# EAGLE board SEALD KRSBI 2K20 (EAGLE 9.6.2), part 1 of 2
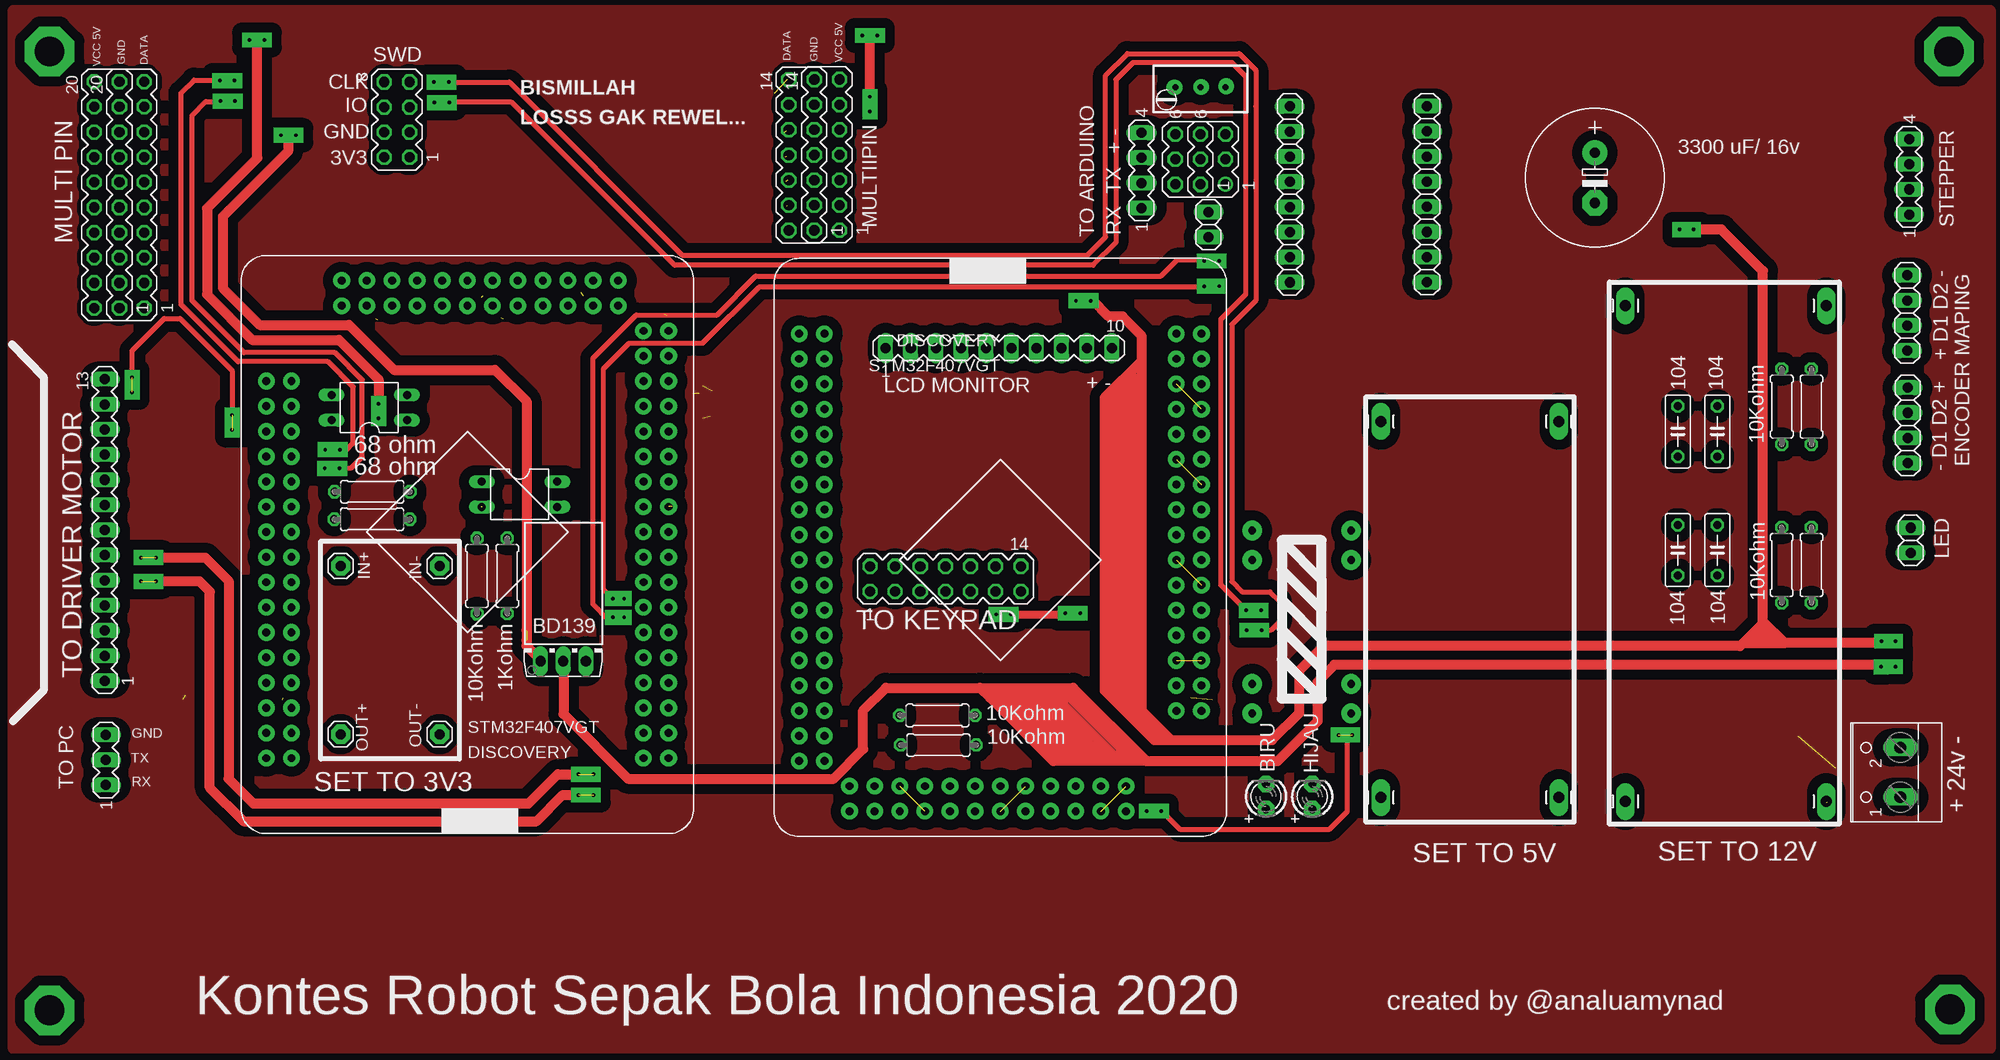
[diagram p0: board, top side]
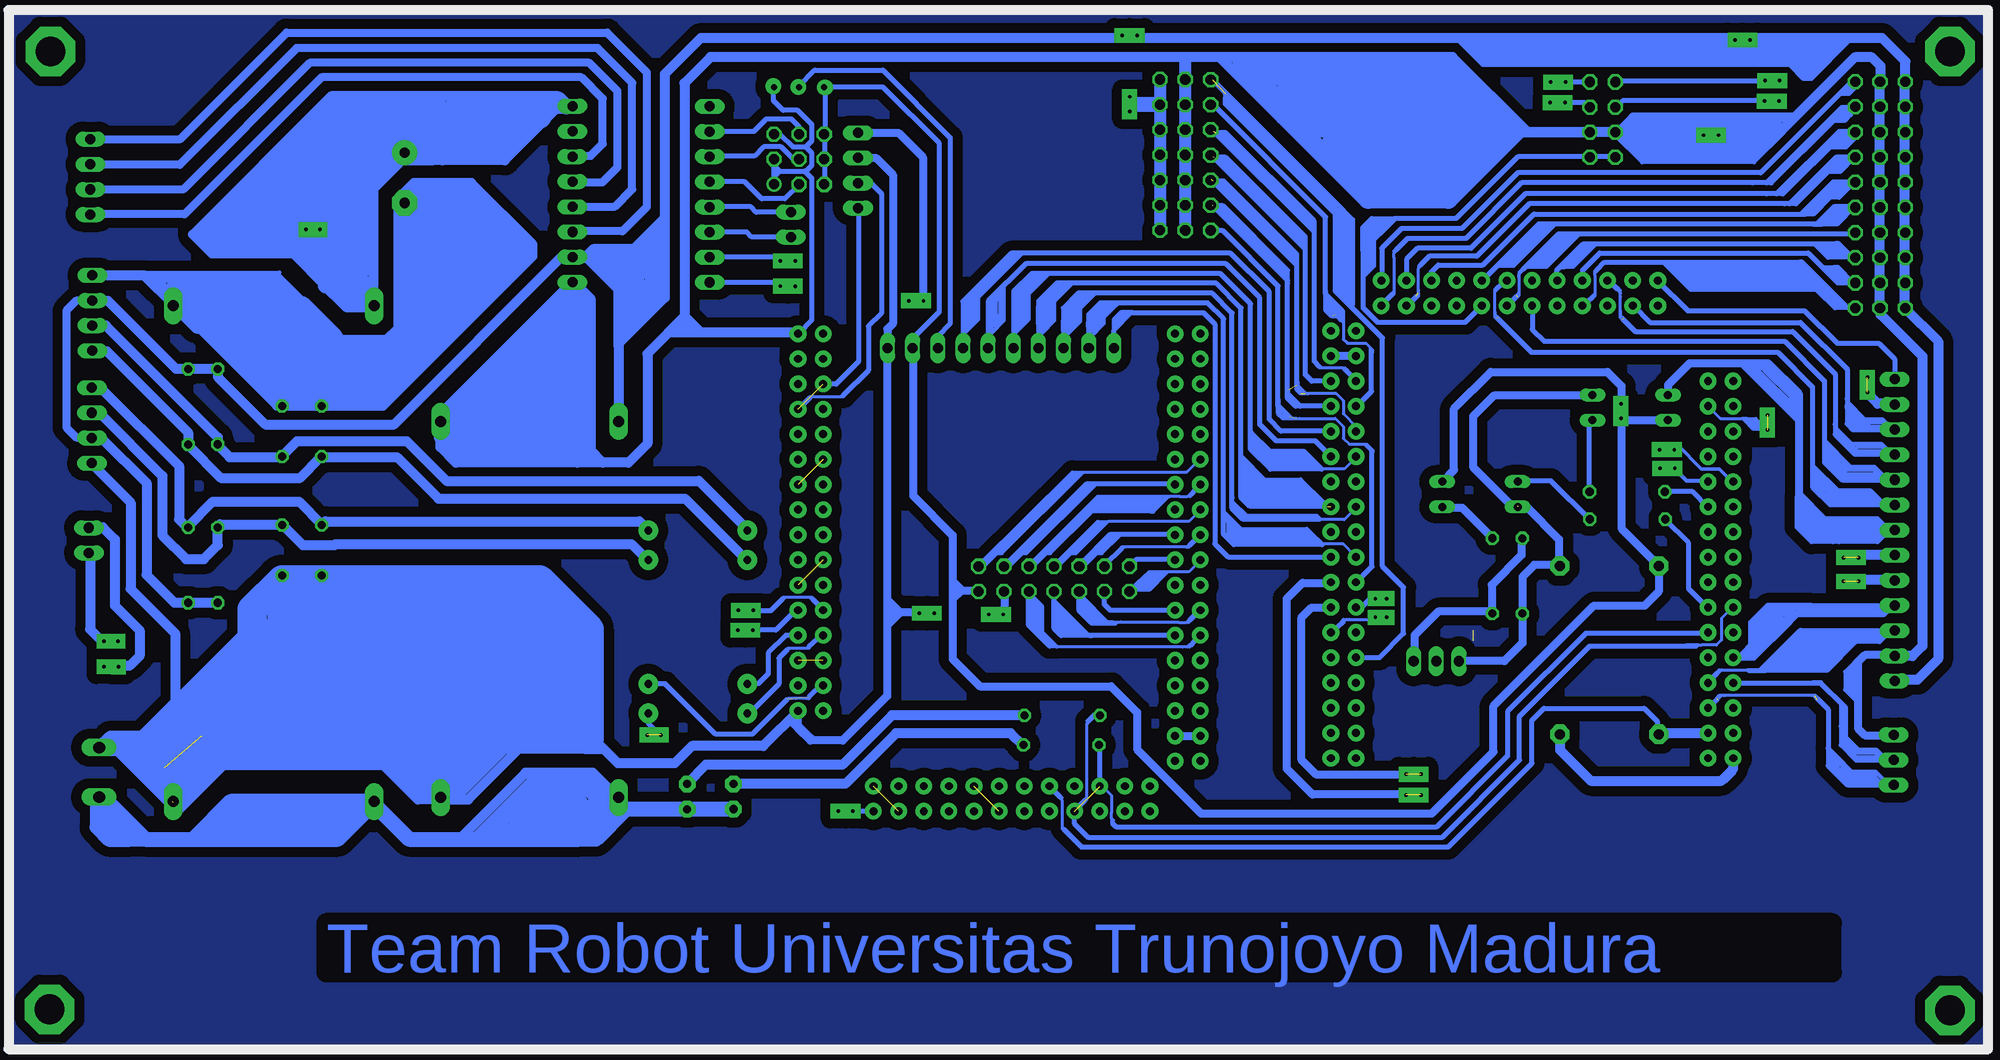
[diagram p1: board, bottom side, seen from below]

No outline drawn. Coordinates in mm, seen from the top.
Copper layers (1*16): Top 0.035mm / dielectric 1.5mm / Bottom 0.035mm
Design rules "default *": minimum track width 6mil, minimum drill 0.35mm, track to track 40mil, track to pad 40mil, pad to pad 40mil, via to via 40mil, smd to smd 30mil, copper to edge 0mil, drill to drill 0mil, minimum pad ring 10mil, minimum via ring 8mil, stop-mask expansion 0mil, vias tented up to drill 0mil, thermal gap 0mil

## Footprints (pad centres in the part's own frame; a part is rotated, then mirrored left to right if it is on the bottom)
DIL04 = drill 0.813 long: 1 -1.27,-3.81; 2 1.27,-3.81; 3 1.27,3.81; 4 -1.27,3.81
0207/7 = drill 0.813 octagon: 1 -3.81,0; 2 3.81,0
MA03-1 = drill 1.016 long: 1 -2.54,0; 2 0,0; 3 2.54,0
C050-025X075 = drill 0.813 octagon: 1 -2.54,0; 2 2.54,0
MA04-2 = drill 1.016 octagon: 1 -3.81,-1.27; 2 -3.81,1.27; 3 -1.27,-1.27; 4 -1.27,1.27; 5 1.27,-1.27; 6 1.27,1.27; 7 3.81,-1.27; 8 3.81,1.27
MA10-1 = drill 1.016 long: 1 -11.43,0; 2 -8.89,0; 3 -6.35,0; 4 -3.81,0; 5 -1.27,0; 6 1.27,0; 7 3.81,0; 8 6.35,0; 9 8.89,0; 10 11.43,0
RTRIMT93YA = drill 0.61: 1 0,-2.54; 2 0,0; 3 0,2.54
MA10-2 = drill 1.016 octagon: 1 -11.43,-1.27; 2 -11.43,1.27; 3 -8.89,-1.27; 4 -8.89,1.27; 5 -6.35,-1.27; 6 -6.35,1.27; 7 -3.81,-1.27; 8 -3.81,1.27; 9 -1.27,-1.27; 10 -1.27,1.27; 11 1.27,-1.27; 12 1.27,1.27; 13 3.81,-1.27; 14 3.81,1.27; 15 6.35,-1.27; 16 6.35,1.27; 17 8.89,-1.27; 18 8.89,1.27; 19 11.43,-1.27; 20 11.43,1.27
1X01_LONGPAD = drill 1.118 pad 1.88 long: 1 0,0
TO126AV = drill 1.016 long: B 2.286,-1.27; C 0,-1.27; E -2.286,-1.27
1X04 = drill 1.016 long: 1 -3.81,0; 2 -1.27,0; 3 1.27,0; 4 3.81,0
MA13-1 = drill 1.016 long: 1 -15.24,0; 2 -12.7,0; 3 -10.16,0; 4 -7.62,0; 5 -5.08,0; 6 -2.54,0; 7 0,0; 8 2.54,0; 9 5.08,0; 10 7.62,0; 11 10.16,0; 12 12.7,0; 13 15.24,0
E5-13 = drill 1.016 pad 2.54: + -2.54,0 | drill 1.016 pad 2.54 octagon: - 2.54,0
LED3MM = drill 0.813 pad 1.676 octagon: A -1.27,0; K 1.27,0
W237-102 = drill 1.194 long: 1 -2.5,-1.27; 2 2.5,-1.27
1X08 = drill 1.016 long: 1 -8.89,0; 2 -6.35,0; 3 -3.81,0; 4 -1.27,0; 5 1.27,0; 6 3.81,0; 7 6.35,0; 8 8.89,0
MA03-2 = drill 1.016: 1 -2.54,-1.27 | drill 1.016 octagon: 2 -2.54,1.27; 3 0,-1.27; 4 0,1.27; 5 2.54,-1.27; 6 2.54,1.27
1X02 = drill 1.016 long: 1 -1.27,0; 2 1.27,0
MA04-1 = drill 1.016 long: 1 -3.81,0; 2 -1.27,0; 3 1.27,0; 4 3.81,0
MA07-2 = drill 1.016 octagon: 1 -7.62,-1.27; 2 -7.62,1.27; 3 -5.08,-1.27; 4 -5.08,1.27; 5 -2.54,-1.27; 6 -2.54,1.27; 7 0,-1.27; 8 0,1.27; 9 2.54,-1.27; 10 2.54,1.27; 11 5.08,-1.27; 12 5.08,1.27; 13 7.62,-1.27; 14 7.62,1.27
1X01 = drill 1.016 pad 1.93 octagon: 1 0,0
STM32F407VGT = drill 0.8 pad 1.676: 1 22.86,12.7; 2 25.4,12.7; 3 22.86,15.24; 3.3V(0) -12.7,-25.4; 3.3V(1) 22.86,-20.32; 3.3V(3) 10.16,17.78; 4 25.4,15.24; GND -15.24,-27.94; GND(0) -15.24,-25.4; GND(1) 25.4,-20.32; GND(2) -15.24,10.16; GND(3) 12.7,17.78; PA0 25.4,-15.24; PA1 22.86,-12.7; PA2 25.4,-12.7; PA3 25.4,-10.16; PA4 22.86,-7.62; PA5 25.4,-7.62; PA6 22.86,-5.08; PA7 25.4,-5.08; PA8 -15.24,7.62; PA9 -12.7,5.08; PA10 -15.24,5.08; PA11 -12.7,2.54; PA12 -15.24,2.54; PA13 -12.7,0; PA14 -15.24,0; PA15 -12.7,-2.54; PB0 22.86,0; PB1 25.4,0; PB2 25.4,10.16; PB3 -12.7,-17.78; PB4 -15.24,-17.78; PB5 -12.7,-20.32; PB6 -15.24,-20.32; PB7 -12.7,-22.86; PB8 22.86,2.54; PB9 25.4,2.54; PB10 15.24,17.78; PB11 12.7,20.32; PB12 10.16,20.32; PB13 7.62,17.78; PB14 7.62,20.32; PB15 5.08,17.78; PC0 22.86,-17.78; PC1 25.4,-17.78; PC2 22.86,-15.24; PC3 22.86,-10.16; PC4 22.86,-2.54; PC5 25.4,-2.54; PC6 -5.08,20.32; PC7 -7.62,17.78; PC8 -7.62,20.32; PC9 -12.7,7.62; PC10 -15.24,-2.54; PC11 -12.7,-5.08; PC12 -15.24,-5.08; PC13 25.4,-22.86; PD0 -12.7,-7.62; PD1 -15.24,-7.62; PD2 -12.7,-10.16; PD3 -15.24,-10.16; PD4 -12.7,-12.7; PD5 -15.24,-12.7; PD6 -12.7,-15.24; PD7 -15.24,-15.24; PD8 5.08,20.32; PD9 2.54,17.78; PD10 2.54,20.32; PD11 0,17.78; PD12 0,20.32; PD13 -2.54,17.78; PD14 -2.54,20.32; PD15 -5.08,17.78; PE0 -15.24,-22.86; PE1 22.86,5.08; PE2 22.86,-27.94; PE3 25.4,-27.94; PE4 22.86,-25.4; PE5 25.4,-25.4; PE6 22.86,-22.86; PE7 25.4,5.08; PE8 22.86,7.62; PE9 25.4,7.62; PE10 22.86,10.16; PE11 20.32,20.32; PE12 20.32,17.78; PE13 17.78,20.32; PE14 17.78,17.78; PE15 15.24,20.32; VCC -12.7,-27.94; VCC(2) -12.7,10.16

## Placement (x,y rotation side)
E$1  [DIL04]  130.8,-15.6 90 top
E$2  [0207/7]  131.1,-24.1 0 top
E$3  [MA03-1]  104.2,-51.2 90 top
E$5  [C050-025X075]  263,-18 90 top
E$6  [C050-025X075]  267,-30 90 top
E$7  [MA04-2]  133.6,13.5 90 top
E$8  [MA10-1]  194.4,-9.58 0 top
E$9  [RTRIMT93YA]  214.78,16.8 90 top
E$10  [MA10-2]  106.8,5.9 90 top
E$11  [MA10-2]  104.3,5.9 90 top
E$12  [1X01_LONGPAD]  251,-17 180 top
E$13  [1X01_LONGPAD]  233,-17 180 top
E$14  [TO126AV]  150.4,-39.95 0 top
E$15  [1X04]  286.22,-17.39 90 top
E$16  [MA13-1]  104.09,-27.97 90 top
E$17  [E5-13]  254.63,7.63 270 top
E$18  [LED3MM]  221.4,-54.9 90 top
E$19  [LED3MM]  226.07,-54.91 90 top
E$20  [0207/7]  188.2,-46.7 0 top
E$21  [0207/7]  188.3,-49.7 0 top
E$22  [1X04]  286.17,-6.04 90 top
E$23  [1X01_LONGPAD]  257.7,-5.3 0 top
E$24  [1X01_LONGPAD]  278,-5.3 0 top
E$25  [1X01_LONGPAD]  278,-55.4 0 top
E$26  [1X01_LONGPAD]  257.7,-55.4 0 top
E$27  [1X01_LONGPAD]  251,-55 180 top
E$28  [1X01_LONGPAD]  233,-55 180 top
E$29  [W237-102]  284.22,-52.45 90 top
E$30  [1X08]  223.81,5.95 90 top
E$31  [1X08]  237.67,5.97 90 top
E$32  [MA03-2]  216.05,9.5 90 top
E$33  [MA03-2]  213.5,9.5 90 top
E$34  [1X02]  215.6,2.9 90 top
E$35  [MA04-1]  208.82,8.37 90 top
E$36  [MA04-1]  286.38,7.72 90 top
E$37  [1X02]  286.53,-29.01 90 top
E$38  [C050-025X075]  263,-30 90 top
E$40  [C050-025X075]  267,-18 90 top
E$42  [DIL04]  145.98,-24.35 270 top
E$43  [0207/7]  131.08,-26.88 0 top
E$44  [0207/7]  144.74,-32.61 90 top
E$45  [0207/7]  141.69,-32.61 90 top
E$46  [MA07-2]  189.01,-32.9 0 top
E$47  [MA07-2]  174.46,9.93 90 top
E$48  [MA07-2]  177.04,9.94 90 top
E$49  [0207/7]  276.5,-15.5 270 top
E$50  [0207/7]  273.5,-31.5 270 top
E$51  [0207/7]  273.5,-15.49 270 top
E$52  [0207/7]  276.5,-31.5 270 top
IN+  [1X01]  127.9,-31.6 90 top
IN-  [1X01]  137.9,-31.6 90 top
OUT+  [1X01]  127.9,-48.6 90 top
OUT-  [1X01]  137.9,-48.6 90 top
U$1  STM32F407(BOARD)  [STM32F407VGT]  199.64,-36.07 180 top
U$2  STM32F407(BOARD)  [STM32F407VGT]  135.64,-23.08 0 top

## Library data of the parts
E$1 E$42 = ic-package
E$2 E$43-E$45 = resistor
E$3 E$7 E$8 E$10 E$11 E$16 E$32 E$33 E$35 E$36 E$46-E$48 = con-lstb
E$5 E$6 E$9 E$17 E$20 E$21 E$38 E$40 E$49-E$52 = rcl
E$12 E$13 E$23-E$28 = SparkFun-Connectors
E$14 = transistor-power
E$15 E$22 E$30 E$31 E$34 E$37 = pinhead
E$18 E$19 IN+ IN- OUT+ OUT- = adafruit
E$29 = con-wago-500
U$1 U$2 = KRI COMPONENT

## Nets
N$6: U$1.PB10 U$1.PB11
N$7: U$1.PD8 U$1.PD9
N$8: U$1.PC6 U$1.PC7
N$9: U$1.PA9 U$1.PA10
N$10: U$1.PC10 U$1.PC11
N$11: U$1.PD5 U$1.PD6
N$12: U$1.PB6 U$1.PB7
S$4: U$2.PD13
S$15: E$3.2
S$18: IN-.1
S$43: OUT+.1
S$44: OUT-.1
S$69: U$2.3.3V(3)
S$78: E$13.1
S$97: E$35.3
S$145: E$30.7
S$156: E$12.1
S$214: E$26.1
S$306: IN+.1

## Tracks (layer width: path | path; a pad name or v marks a point on that pad's centre or on a via)
DD
  pour Top: 94.9,24.6 294.6,24.6 294.6,-80 294.6,-80.4 292.4,-80.4 94.8,-80.4 94.8,-69.7 94.8,24.6
N$6  (1 unrouted)
N$7  (1 unrouted)
N$8  (1 unrouted)
N$9  (1 unrouted)
N$10  (1 unrouted)
N$11  (1 unrouted)
N$12  (1 unrouted)
PG
  pour Bottom: 94.8,24.4 294.5,24.39 294.5,-80.2 94.8,-80.2
S$1  (via drill 0.35 pad 1.5)  (2 unrouted)
  Top 1: v109.25,-30.75 114.25,-30.75 116.6,-33.1 116.6,-53.1 119.1,-55.6 146.9,-55.6 149.85,-52.65 v151.95,-52.65
  other vias: 107.75,-30.75 153.45,-52.65
S$2
  Bottom 1: 146.2,12.8 146.2,11.5 | 146.2,11.5 147.8,11.5 | 146.2,11.5 144.6,11.5 144.6,11.8
S$3  (via drill 0.35 pad 1.5)  (2 unrouted)
  Top 1: v151.95,-54.75 150.35,-54.75 147.7,-57.4 118.1,-57.4 114.7,-54 114.7,-34.2 113.65,-33.15 v109.25,-33.15
  other vias: 107.75,-33.15 153.45,-54.75
S$5
  Bottom 0.4: 108.4,-21.7 111.2,-18.9 | 111.2,-18.9 111.2,-18.6 | 111.2,-18.9 111.2,-20.5 110.3,-21.4 110.2,-21.3 109,-21.3 | 109,-21.3 108.9,-21.4 | 109,-21.3 110.7,-19.6 110.9,-19.6 110.9,-20.4 110.3,-21 109.7,-21 110.6,-20.1 110.7,-20.1 110.7,-20.2 110.2,-20.7
  Bottom 0.5: 140.7,-5.3 140.7,-7.7 139.5,-8.9 115.2,-8.9 111.2,-12.9 111.2,-18.6 111.2,-21.1 109.4,-22.9 104.1,-22.9
S$6
  Bottom 1: 152.9,17.9 164.8,17.9 164.8,15.9 147.8,15.9 147.8,13.7 | 147.8,13.7 161.2,13.7 | 147.8,13.7 145,13.7 145,9.8 155.1,9.8 155.1,15.5 | 155.1,15.6 155.1,15.5 | 155.1,15.5 148.6,15.5 | 155.1,15.5 160.2,15.5 160.2,15.4
S$7
  Bottom 0.4: 113.9,-17.9 113.9,-17 119.3,-11.6 | 119.8,-11.1 119.3,-11.6 | 119.3,-11.6 117.1,-11.6
  Bottom 0.8: 104.1,-28 110.9,-28 113.8,-25.1 113.8,-14.2 116.9,-11.1 119.8,-11.1 124.8,-11.1 127,-13.3 127,-14.3
  Bottom 1: 117.1,-11.6 114.3,-14.4 114.3,-15.7 114,-16 114,-16.1 118.2,-11.9 118.4,-11.9
S$8
  Bottom 0.5: 134.6,-17.1 135,-17.5 135,-24.1
S$9  (2 unrouted)
  Bottom 0.3: 112.33,-44.7 112.06,-44.7 111.75,-45 | 112.33,-44.7 121.2,-44.7 121.84,-44.7 122.08,-44.94 | 112.2,-44.7 112.5,-44.7 | 112.33,-44.7 111.96,-45.08 | 121.4,-44.7 121.56,-44.7 121.98,-45.12
S$10
  Bottom 0.8: 230,-16.88 230,-17.12
S$11
  Bottom 0.4: 104.3,-17.8 105.3,-16.8 107.4,-16.8 106.7,-17.5 104.9,-17.5 | 104.9,-17.5 104.8,-17.6 | 104.9,-17.5 105.3,-17.1 106.8,-17.1 | 107,-16.9 108.9,-15 108.9,-14.7 | 108.9,-15.4 108.94,-15.44 108.94,-17.26 108.35,-17.85 106.27,-17.85 106.62,-17.5 108.2,-17.5 108.7,-17 108.7,-16.3 | 108.7,-16.2 108.7,-16.3 | 108.7,-16.3 108.1,-16.9 | 107.7,-17.3 108.1,-16.9 | 108.1,-16.9 108.4,-16.9 108.4,-17 108.1,-17.3
  Bottom 0.5: 130.5,-5.3 128.8,-7 113.6,-7 108.9,-11.7 108.9,-14.7 108.9,-15.4 108.9,-15.6 106.7,-17.8 104.3,-17.8 104.2,-17.8
S$12
  Bottom 0.4: 108.3,-19.4 110.1,-17.6 | 110.1,-17.6 110.1,-17.3 | 110.1,-17.6 110.1,-17.9 108.8,-19.2
  Bottom 0.5: 131.6,-6.6 130.3,-7.9 114.4,-7.9 110.1,-12.2 110.1,-17.3 110.1,-18.3 108.1,-20.3 104.1,-20.3
S$13
  Bottom 0.5: 108.42,14.71 109.41,14.71 117.01,7.11 141.79,7.11 147.4,1.5 153.3,1.5 154.5,0.3
S$14
  Bottom 0.4: 123.1,-23 125.1,-23 126.4,-21.7
S$15
  Bottom 0.4: 104.9,-51.2 105.9,-50.2 108.7,-50.2 108,-50.9 105.6,-50.9 | 105.5,-50.9 105.6,-50.9 | 105.6,-50.9 106,-50.5 108.1,-50.5 | 107.6,-50.3 109.5,-48.4 | 109.5,-48.4 109.5,-47.8 | 109.5,-48.4 109.5,-49.2 108.7,-50 108.3,-50 109.2,-49.1
  Bottom 0.5: 120.3,-43.4 111.6,-43.4 109.5,-45.5 109.5,-47.8 109.5,-49.7 108,-51.2 104.9,-51.2 E$3.2
S$16
  Bottom 0.5: 185.9,-55.3 187,-56.4 187,-57.6 185.6,-59 149.8,-59 142,-51.2 142,-46.8 134.9,-39.7 124.8,-39.7
S$17
  Bottom 0.8: 104.1,-40.6 107.1,-40.6 107.8,-41.3 107.8,-48 107.1,-48.7 104.2,-48.7
S$18
  Bottom 1: 138,-31.5 IN-.1
S$19
  Bottom 0.4: 108.1,9.7 109.6,8.2 110.8,8.2 114.04,4.96 115.2,4.96 115.16,5 114.2,5 110.9,8.3 110.9,8.4 109.9,9.4 109.3,9.4 | 109.3,9.4 108.8,9.4 109.7,8.5 109.9,8.5 | 109.9,8.5 110.3,8.5 | 110.3,8.5 110.4,8.4 | 110.3,8.5 109.7,9.1 109.7,9.2 | 109.3,9.4 109.9,8.8 109.9,8.5
  Bottom 0.5: 108.1,9.7 110,9.7 114.7,5 141,5 146.3,-0.3 151.1,-0.3 151.95,-1.15
S$20
  Bottom 0.4: 108.2,-3 109.8,-1.4 110.2,-1.4 | 111.3,-1.4 110.2,-1.4 | 110.2,-1.4 109,-2.6 | 108.9,-2.7 109,-2.6 | 109,-2.6 109.8,-2.6 110.7,-1.7 | 110.7,-1.7 110.8,-1.7 | 110.7,-1.7 110.2,-1.7 109.6,-2.3
  Bottom 0.5: 135.6,-2.8 135.6,-1.7 133.88,0.02 112.82,0.02 109.8,-3 108.2,-3 108.1,-3
S$21
  Bottom 0.4: 108.2,12.3 108.6,11.9 109.5,11.9 115.45,5.95 | 115.45,5.95 117.03,5.95 | 115.45,5.95 115.35,5.95 109.3,12
  Bottom 0.5: 108.1,12.3 108.2,12.3 109.7,12.3 116,6 141.4,6 146.9,0.5 152.3,0.5 153.4,-0.6 153.4,-2.8
S$22
  Bottom 0.5: 117.5,17.4 132.2,17.4
S$23
  Bottom 0.4: 109.6,-24.2 112.4,-21.4 | 112.4,-21.4 112.4,-20.9 | 112.4,-21.4 112.4,-23.1 111.7,-23.8 111.6,-23.7 110.5,-23.7 | 110.4,-23.7 110.5,-23.7 | 110.5,-23.7 112,-22.2 | 112.1,-22.1 112,-22.2 | 112,-22.2 112,-23 111.5,-23.5 111.2,-23.5 111.8,-22.9 111.8,-22.8
  Bottom 0.5: 144.33,-6.47 140.8,-10 115.9,-10 112.4,-13.5 112.4,-20.9 112.4,-23.6 110.6,-25.4 104.1,-25.4
S$24
  Top 0.5: 220.9,-36.16 219.45,-36.16 216.83,-33.54 216.83,-6.67 219.36,-4.14 219.36,17.85 217.94,19.27 207.96,19.27 206.23,17.54 206.23,1.07 203.94,-1.22 161.66,-1.22 145.2,15.24 138.89,15.24
S$25
  Bottom 1: 105.6,-5.6 105.6,17.4 105.5,17.5 105.5,18.9 106.4,19.8 108.13,19.8 115.69,12.24 134.9,12.24
S$26
  Top 0.5: 138.96,17.29 144.96,17.29 162.43,-0.18 203.38,-0.18 205.2,1.64 205.2,17.99 207.38,20.17 218.69,20.17 220.36,18.5 220.36,14.84 220.37,14.83 220.37,-4.77 217.95,-7.19 217.95,-33.18 218.98,-34.21 221.81,-34.21 222.73,-35.13 222.73,-37.25 221.88,-38.1 221.03,-38.1
S$27  (1 unrouted)
  Bottom 0.8: 134.6,-14.4 144.6,-14.4 146.7,-16.5 146.7,-21.6 142.7,-25.6 142.2,-25.6 | 138,-31.3 138,-28.9 141.3,-25.6 142.1,-25.6
S$28
  Bottom 0.3: 120.5,-35.8 121.6,-36.9 121.6,-39.1 122.1,-39.6 123.6,-39.6 123.9,-39.6 | 123.9,-39.6 125.2,-39.6 125.2,-39.7 125.3,-39.8 124.1,-39.8 123.9,-39.6
S$29
  Bottom 0.4: 111.9,-3.7 124.7,-3.7 127.4,-1 115.1,-1 112.7,-3.4 112.5,-3.4 112.6,-3.3 124.6,-3.3 126.7,-1.2 115.2,-1.2 113.5,-2.9 | 113.4,-3 113.5,-2.9 | 113.5,-2.9 124.5,-2.9 126,-1.4 126.2,-1.4 126,-1.6 115.1,-1.6 114.2,-2.5 | 113.9,-2.8 114.2,-2.5 | 114.2,-2.5 124.6,-2.5 125.2,-1.9 125.3,-1.9 125.2,-2 115,-2 114.8,-2.2 124.4,-2.2 124.5,-2.3 | 108.3,-5.5 108.8,-5.5 113.43,-0.87 113.73,-0.87 | 115.35,-0.87 113.73,-0.87 | 113.73,-0.87 109.5,-5.1 110,-5.1 114,-1.1
  Bottom 0.5: 108.1,-5.5 108.3,-5.5 110.1,-5.5 111.9,-3.7 114.68,-0.92 133.41,-0.92 134.17,-1.68
S$30
  Bottom 0.5: 214.09,10.76 213.48,11.37 213.48,13 214.92,14.44 216.39,14.44 217.37,15.42 217.37,16.77
S$31
  Bottom 0.5: 212.25,16.84 212.15,16.74 212.15,11.97
S$32
  Bottom 0.5: 214.8,16.9 213.2,18.5 206.3,18.5 199.5,11.7 199.5,-7.1 200.8,-8.4 200.8,-9.6
S$33
  Bottom 0.8: 158.5,-10.4 161.1,-10.4
S$34
  Bottom 0.8: 174.2,-48.8 176.8,-48.8
S$35
  Bottom 1.5: 178.28,15.03 181.3,15.03 181.32,15.05
S$36
  Bottom 0.5: 216.57,-35.08 217.63,-36.14 219.27,-36.14
S$37  (via drill 0.35 pad 1.5)
  other vias: 219.41,-36.09
S$38  (via drill 0.35 pad 1.5)
  other vias: 220.91,-36.09
S$39
  Top 1: 181.42,15.03 181.42,21.51
S$40
  Bottom 0.5: 215.22,-36.18 217.12,-38.08 219.33,-38.08
S$41  (via drill 0.35 pad 1.5)
  other vias: 219.44,-38.09
S$42
  Bottom 0.5: 189.47,-39.7 191.59,-37.58 191.59,-34.5
S$43
  Bottom 1: 123,-48.5 127.8,-48.5 OUT+.1
S$44
  Bottom 0.8: 137.8,-50.3 134.9,-53.2 121.3,-53.2 120.4,-52.3 120.4,-51.2 120.4,-51.1
  Bottom 1: OUT-.1 137.9,-50.2 134.9,-53.2 134.8,-53.3 121.6,-53.3 120.4,-52.1 120.4,-51.2
S$45
  Top 1: 283.9,-41.6 228.3,-41.6 226.6,-43.3 226.6,-47.3 222.6,-51.3 209.3,-51.3 | 150.43,-41.24 150.43,-46.57 156.95,-53.09 177.71,-53.09 180.7,-50.1 180.7,-46.2 183,-43.9 192.5,-43.9 | 192.5,-43.9 201.9,-43.9 209.3,-51.3 | 209.3,-51.3 199.9,-51.3 193.5,-44.9 | 192.5,-43.9 193.5,-44.9 | 193.5,-44.9 201.6,-44.9 207.5,-50.8 | 207.5,-50.8 207.7,-50.8 | 207.5,-50.8 206.1,-50.8 | 206.1,-50.8 200.6,-50.8 195,-45.2 | 195,-45.2 194.9,-45.2 | 195,-45.2 200.5,-45.2 205.2,-49.9 | 206.1,-50.8 205.2,-49.9 | 205.2,-49.9 200.7,-49.9 197,-46.2 | 196.6,-45.8 197,-46.2 | 197,-46.2 200.2,-46.2 203.3,-49.3 | 203.3,-49.3 203.4,-49.3 | 203.3,-49.3 201.2,-49.3 198.5,-46.6 | 198.5,-46.6 198.4,-46.6 | 198.5,-46.6 199.7,-46.6 202.1,-49
S$46
  Bottom 0.5: 161.05,-38.35 159.74,-37.14
S$47
  Top 1: 270.8,-38.8 270.9,-38.9 272.7,-38.9
S$48
  Bottom 0.8: 149.8,-25.7 147.8,-25.7 144.8,-28.7
S$49
  Bottom 0.5: 176.89,-38.64 188.29,-38.64 189.02,-37.91 189.02,-34.52
S$50
  Bottom 0.5: 185.28,-37.33 186.49,-36.12 186.49,-34.44
S$51
  Bottom 0.5: 176.8,-36.04 177.13,-36.04 177.17,-36.08 183.33,-36.08 183.93,-35.48 183.93,-34.5
S$52
  Bottom 0.5: 179.4,-32.3 181.17,-33.98
S$53
  Bottom 0.5: 176.95,-30.92 180.68,-30.92 181.33,-31.57
S$54
  Bottom 0.5: 182.25,-29.91 183.75,-31.41
S$55
  Bottom 0.5: 176.93,-28.44 183.34,-28.44 186.35,-31.45
S$56
  Bottom 0.5: 184.58,-27.19 188.87,-31.48
S$57
  Bottom 0.5: 184.53,-24.64 191.46,-31.57
S$58
  Bottom 0.4: 134.3,0.9 136.6,-1.4 137.4,-1.4 | 137.9,-1.4 137.4,-1.4 | 137.4,-1.4 135.3,0.7 134.9,0.7 | 134.8,0.7 134.9,0.7 | 134.9,0.7 136.8,-1.2 | 108.3,-0.4 109.71,1.01 110.11,1.01 | 112.35,1.01 110.11,1.01 | 110.11,1.01 109.1,0 | 109,-0.1 109.1,0 | 109.1,0 110.8,0 111.5,0.7 110.2,0.7 109.9,0.4 109.9,0.3 109.8,0.2 | 109.8,0.2 109.7,0.2 | 109.8,0.2 110.6,0.2 110.8,0.4 | 110.8,0.4 110.3,0.4 | 110.8,0.4 111,0.4 111.1,0.5
  Bottom 0.5: 108.1,-0.4 108.3,-0.4 110.8,-0.4 112.16,0.96 135.54,0.96 137.9,-1.4 138.2,-1.7 138.2,-2.8
S$59
  Bottom 0.5: 108.1,2.1 108.25,1.95 138.05,1.95 141.6,-1.6
S$60  (via drill 0.35 pad 1.5)
  Top 1: 272,-38.6 271.4,-38.6 271.6,-38.4 271.6,-37.4 | 269.6,-39.4 269.3,-39.7 227.2,-39.7 224.7,-42.2 224.7,-46.5 222,-49.2 211.8,-49.2 | 269.6,-39.4 271.6,-37.4 | 283.5,-39.4 273.8,-39.4 | 269.6,-39.4 273.8,-39.4 | 273.8,-39.4 271.6,-37.2 | 271.6,-37.4 271.6,-37.2 | 271.6,-37.2 271.6,-1.8 267.4,2.4 v264.6,2.4 | v203.7,-4.8 203.9,-4.8 205.5,-6.4 206.9,-6.4 208.8,-8.3 208.8,-10.9 | 208.8,-10.9 205.1,-14.6 205.1,-44.2 207.9,-47 | 211.8,-49.2 210.1,-49.2 208.8,-47.9 | 208.8,-10.9 208.8,-47.9 | 208.8,-47.9 207.9,-47 | 207.9,-47 207.9,-12.4 206.9,-13.4 206.9,-45.5 | 206.9,-45.5 207,-45.6 | 206.9,-45.5 206,-44.6 206,-14.6 206.3,-14.3 | 211.8,-49.2 208.3,-45.7 208.3,-46.5 210.5,-48.7
S$61
  Bottom 1: 286.1,-4.8 284.6,-4.8 277.7,-11.7 273.6,-11.7
S$62
  Bottom 0.5: 123,-38.4 135.3,-38.4 143.2,-46.3 143.2,-50.8 150.4,-58 182.7,-58 183.1,-57.6
S$63
  Bottom 1.025: 215.51,-47.19 213.6,-49.1
S$64
  Bottom 0.4: 118.2,-39.1 120,-40.9 | 120,-40.9 120.6,-40.9 | 120,-40.9 119.4,-40.9 119.1,-40.6 | 118.1,-39.6 119.1,-40.6 | 119.1,-40.6 119.4,-40.6 118.4,-39.6 117.8,-39.6 | 117.8,-39.6 117.7,-39.5 | 117.8,-39.6 118.3,-40.1 118.3,-40.5 118.4,-40.6 | 104.2,-35.6 105.2,-36.6 114,-36.6 | 114,-36.6 114.6,-37.2 | 114,-36.6 113.3,-35.9 104.8,-35.9 105.2,-36.3 113.4,-36.3 | 112.4,-35.6 112.45,-35.55 116.95,-35.55 118.7,-37.3 118.7,-40.9 118.4,-40.6 | 118.4,-40.6 118.3,-40.6 113.6,-35.9 116.7,-35.9 116.9,-36.1 | 118.4,-37.6 116.9,-36.1 | 116.9,-36.1 116.9,-35.9 | 116.9,-35.8 116.9,-35.9 | 116.9,-35.9 118.4,-37.4 118.4,-40.3 114.3,-36.2 116.6,-36.2 118,-37.6 118,-39.7 114.9,-36.6 114.9,-36.5 116.5,-36.5 117.8,-37.8 117.8,-39.1 115.5,-36.8 116.4,-36.8 117.6,-38 117.6,-38.4 117.5,-38.5 116.1,-37.1 116.1,-37 116.4,-37 117.4,-38
  Bottom 0.5: 120.5,-40.9 118.7,-40.9 118.3,-40.9 114.6,-37.2 113,-35.6 112.4,-35.6 104.2,-35.6 104.1,-35.6
S$65
  Top 0.5: 127.45,-19.95 128.45,-19.95 129.2,-19.2 129.2,-13.5 126.65,-10.95 117.55,-10.95 111.8,-5.2 111.8,16.2 113.1,17.5 116.05,17.5
S$66
  Top 0.5: 127.9,-21.7 129,-21.7 130.1,-20.6 130.1,-12.8 127.35,-10.05 118.15,-10.05 112.9,-4.8 112.9,13.92 114.3,15.32 116.7,15.32
S$67
  Bottom 0.4: 108.1,4.7 109.89,2.91 111.39,2.91 | 112.34,2.91 111.39,2.91 | 111.39,2.91 109.9,4.4 108.8,4.4 | 108.7,4.4 108.8,4.4 | 108.8,4.4 110,3.2 110.7,3.2 | 110.7,3.2 110.9,3 | 110.7,3.2 109.7,4.2 109.5,4.2 109.4,4.1 110.1,3.4 110.2,3.4
  Bottom 0.5: 108.1,4.7 110.2,4.7 111.94,2.96 140.04,2.96 145.8,-2.8
S$68
  Bottom 0.4: 108.1,7.2 109.7,5.6 110.6,5.6 112.29,3.91 113.09,3.91 | 114.12,3.91 113.09,3.91 | 113.09,3.91 110.1,6.9 108.8,6.9 109.8,5.9 110.7,5.9 | 110.7,5.9 112.4,4.2 | 110.7,5.9 109.9,6.7 109.4,6.7 109.9,6.2 110.1,6.2
  Bottom 0.5: 108.1,7.2 110.3,7.2 113.54,3.96 140.54,3.96 145.7,-1.2 150.2,-1.2 150.9,-1.9 150.9,-2.7
S$69
  Bottom 0.4: 154.2,3.5 154.45,3.5 154.5,3.55 | 157.8,-0.5 157.8,0.14 157.85,0.2 157.85,2.65 156.95,3.55 154.07,3.55
  Bottom 0.5: 132.3,9.75 142.15,9.75 148.4,3.5 154.2,3.5 154.6,3.5 157.8,0.3 157.8,-0.5 157.8,-5.5 156.3,-7 147.5,-7 U$2.3.3V(3)
S$70
  Bottom 1: 102.9,17.4 103,17.3 103.1,17.3 103.1,-5.5 99.7,-8.9 99.7,-41 101.8,-43.1 104.2,-43.1
S$71  (via drill 0.35 pad 1.5)
  other vias: 118.7,21.55
S$72
  Bottom 1: 105.5,-5.5 105.5,-6.2 101.3,-10.4 101.3,-39.7 102.3,-40.7 104.1,-40.7
S$73
  Bottom 1: 233,-55.1 235.6,-52.5 242.4,-52.5 248.9,-59 | 248.9,-59 250.5,-59 | 248.9,-59 247.5,-59 241.8,-53.3 236,-53.3 234.3,-55 237.4,-58.1 245.4,-58.1 | 246,-58.1 245.4,-58.1 | 245.4,-58.1 241.3,-54 236.6,-54 235.4,-55.2 237.4,-57.2 243.2,-57.2 | 243.8,-57.2 243.2,-57.2 | 243.2,-57.2 240.6,-54.6 237.4,-54.6 236.6,-55.4 237.5,-56.3 241.1,-56.3 | 241.7,-56.3 241.1,-56.3 | 241.1,-56.3 240.3,-55.5 237.6,-55.5
S$74
  Bottom 1: 251,-55.2 248.2,-55.2 242.4,-49.4 | 242.4,-49.4 242.1,-49.4 | 242.4,-49.4 243.8,-49.4 249,-54.6 249.1,-54.5 250.1,-54.5 250.2,-54.4 250.2,-53.3 250.1,-53.3 247,-50.2 245.4,-50.2 248.8,-53.6 249.4,-53.6 246.7,-50.9
S$75  (2 unrouted)
  Bottom 1: 273.06,-48.76 275.11,-48.76
  Bottom 1.5: 271.5,-49 272.9,-50.4 | 273.9,-51.4 278,-55.5 | 251.2,-55.05 257.25,-49 257.3,-49 | 271.4,-49 271.5,-49 | 277.7,-55.3 271.4,-49 | 271.4,-49 257.3,-49 | 257.3,-49 255.9,-50.4 272.9,-50.4 | 272.9,-50.4 273.9,-51.4 | 273.9,-51.4 254.9,-51.4 254.8,-51.5 273.1,-51.5 277.9,-56.3 | 271.5,-49 284.3,-49 285.3,-50 281,-50 273.8,-50 277.3,-53.5 278.7,-53.5 281.3,-50.9 | 281.3,-50.9 281.6,-50.9 | 281.3,-50.9 276.2,-50.9 276.1,-51 277.1,-52 278.9,-52 | 285.41,-50.01 283.53,-50.01 278.08,-55.46
  Bottom 3: 281,-50 270,-39 270,-36 267,-33 241,-33 236,-38 236,-49 237,-49 239,-47 240,-48
  Bottom 5: 240,-48 249,-48 251,-50 255,-50 258,-47 275,-47 266,-38 266,-36 242,-36 238,-40 238,-45 267,-45 268,-44 263,-39 241,-39 241,-42 262,-42
S$76
  Bottom 1: 251.1,-55.2 253.3,-55.2 256.3,-52.2 | 256.7,-51.8 256.3,-52.2 | 256.3,-52.2 255.1,-52.2 253,-54.3 253,-54.4 252.8,-54.2 250.7,-54.2 250.7,-53.6 255.55,-48.75 256.45,-48.75 | 257.83,-48.75 256.45,-48.75 | 256.45,-48.75 256.4,-48.8 251.7,-53.5
S$77
  Bottom 1: 270.25,-48.75 269.35,-48.75 269.15,-48.95 268.21,-48.95
S$78
  Bottom 1: 103,17.5 103,19.4 105.35,21.75 224.7,21.75 228.35,18.1 228.35,0.8 | E$13.1 233,-9.15 228.35,-4.5 228.35,-2.15 228.35,-1.8 | 228.35,0.8 228.35,-1.8 | 228.35,0.8 229.65,-0.5 228.35,-1.8
S$79  (via drill 0.35 pad 1.5)
  Top 1: 131.75,-15.75 v131.75,-15.2 131.75,-12.75 127.75,-8.75 119,-8.75 114.41,-4.16 114.41,4.54 119.5,9.63 119.5,21.3
S$80  (via drill 0.35 pad 1.6)
  other vias: 217.37,16.87
S$81
  Bottom 1.025: 232.6,-55.6 233.1,-55.1
S$82
  Bottom 1: 271.56,-49.63 271.5,-49.7 270.6,-48.8 255.6,-48.8
S$83
  Bottom 0.35: 120.5,-23.1 121.8,-21.8 123.6,-21.8 126,-19.4 126.4,-19.4
S$84
  Bottom 0.5: 157.15,-35.05 155.95,-35.05
S$85  (via drill 0.35 pad 1.5)
  Top 0.5: 155.55,-35.05 v155.4,-34.9 154.5,-34 154.5,-11.65 157.05,-9.1 164.5,-9.1 170.2,-3.4 215.17,-3.4 215.42,-3.15
S$86
  Top 0.5: 155,-37.05 153.4,-35.45 153.4,-10.6 157.77,-6.23 165.92,-6.23 169.85,-2.3 210.8,-2.3 212.38,-0.72 216.17,-0.72
S$87
  Bottom 1: 286,-18.7 285.2,-18.7 280.7,-23.2 280.7,-32.5 277.9,-35.3 273.5,-35.3
S$88
  Bottom 1: 286.4,-30.3 286.4,-38 285.1,-39.3
S$89
  Bottom 1: 286.5,-27.7 285.1,-27.7 283.9,-28.9 283.9,-35.6 281.4,-38.1 281.4,-40.7 282.4,-41.7 284.9,-41.7
S$90
  Bottom 0.4: 281.6,-2.2 281.38,-2.2 281.12,-1.94 267.26,-1.94
S$91
  Bottom 0.8: 286.38,11.54 277.29,11.54 266.54,22.29 234.16,22.29 230.16,18.29 230.16,4.66 232.61,2.21 236.83,2.21
S$92
  Bottom 1: 286.1,-16.1 285.5,-16.1 279.1,-22.5 279.1,-28.5 276.7,-30.9 274.9,-30.9 273.5,-29.5 273.5,-27.8
S$93
  Bottom 1: 277.85,-5.3 280.91,-2.24 286.27,-2.24
S$94
  Bottom 1: 286.2,-13.6 285.3,-13.6 277.4,-21.5 277.4,-26.9 276.6,-27.7
S$95
  Bottom 0.8: 208.83,12.18 204.75,12.18 202.26,9.69 202.26,-4.73
S$96
  Bottom 0.8: 127.8,-31.7 131.65,-27.85
S$97
  Bottom 0.8: E$35.3 207,9.64 205.3,7.94 205.3,-7.12 205.84,-7.66 205.84,-9.55
S$98
  Bottom 0.5: 208.73,7.13 207.55,7.13 206.46,6.04 206.46,-6.08 207.76,-7.38 207.76,-11.83 210.32,-14.39
S$99
  Bottom 0.5: 208.77,4.55 208.77,-10.97 211.03,-13.23 212.31,-13.23
S$100
  Bottom 0.5: 137.22,15.25 135.41,15.25 135.02,14.86
S$101  (via drill 0.35 pad 1.5)
  other vias: 220.95,-38.09
S$102
  Bottom 0.5: 182.96,-9.56 182.96,-7.76 181.22,-6.02 173.9,-6.02 172.76,-7.16 172.76,-29.36 171.44,-30.68 161.02,-30.68
S$103  (via drill 0.35 pad 1.5)
  other vias: 180.63,22.01
S$104
  Bottom 0.5: 216.18,-0.69 216.96,-0.69 217.26,-0.39 223.56,-0.39
S$105  (via drill 0.35 pad 1.5)
  other vias: 216.67,-0.77
S$106
  Bottom 0.5: 157.2,-35.05 157.9,-35.75 158.45,-35.75
S$107
  Bottom 0.4: 108.6,21.5 112.5,17.6 113.3,17.6 114.7,19 145.7,19 147.8,21.1 | 148.2,21.5 147.8,21.1 | 147.8,21.1 145.5,21.1
  Bottom 1: 145.5,21.1 109.5,21.1 112.4,18.2 113.3,18.2 113.3,18.3 114.1,19.1 | 114.2,19.2 114.1,19.1 | 114.1,19.1 112.3,19.1 111.2,20.2 111.2,20.5 146.4,20.5 146.8,20.9 146.7,20.9 145.4,19.6 112.1,19.6 111.9,19.8
S$108  (via drill 0.35 pad 1.5)
  other vias: 115.7,17.45
S$109  (via drill 0.35 pad 1.5)
  other vias: 117.2,17.45
S$110
  Bottom 0.5: 117.36,15.39 131.59,15.39 132.22,14.76
S$111  (via drill 0.35 pad 1.5)
  other vias: 115.75,15.37
S$112  (via drill 0.35 pad 1.5)
  other vias: 117.25,15.37
S$113  (via drill 0.35 pad 1.5)
  other vias: 138.85,17.3
S$114  (via drill 0.35 pad 1.5)
  other vias: 137.35,17.3
S$115  (via drill 0.35 pad 1.5)
  other vias: 137.38,15.22
S$116  (via drill 0.35 pad 1.5)
  other vias: 215.17,-0.77
S$117  (via drill 0.35 pad 1.5)
  other vias: 216.65,-3.32
S$118  (via drill 0.35 pad 1.5)
  other vias: 215.16,-3.33
S$119  (via drill 0.35 pad 1.5)
  other vias: 126.35,-19.85
S$120  (via drill 0.35 pad 1.5)
  other vias: 127.85,-19.85
S$121  (via drill 0.35 pad 1.5)
  other vias: 127.8,-21.75
S$122  (via drill 0.35 pad 1.5)
  other vias: 126.3,-21.75
S$123  (via drill 0.35 pad 1.5)
  other vias: 156.55,-34.9
S$124  (via drill 0.35 pad 1.5)
  other vias: 155.4,-36.8
S$125  (via drill 0.35 pad 1.5)
  other vias: 156.55,-36.8
S$126
  Bottom 0.8: 205.88,-9.88 205.88,-44.75 210.38,-49.25 213.62,-49.25 214.88,-48 214.88,-46.5
S$127  (via drill 0.8 pad 2)
  other vias: 220,-43.51
S$128
  Bottom 0.5: 188.01,-58.23 186.25,-59.99 149.19,-59.99 140.73,-51.53 140.73,-47.2 139.51,-45.98 129.39,-45.98 128.08,-47.29 128.08,-48.63
S$129  (via drill 0.8 pad 2)
  other vias: 220,-28.01
S$130  (via drill 0.35 pad 1.5)
  other vias: 131.75,-16.7
S$131
  Bottom 0.5: 161.92,-29.45 161.93,-29.44 170.85,-29.44 171.9,-28.39 171.9,-26.2 | 171.9,-26.2 171.9,-6.62 173.5,-5.02 183.24,-5.02 185.53,-7.31 185.53,-9.56 | 171.9,-26.2 170.2,-27.9 163.5,-27.9 163,-28.4 | 162,-29.4 163,-28.4 | 163,-28.4 170.1,-28.4 171.4,-27.1 | 171.6,-26.9 171.4,-27.1 | 171.4,-27.1 171.4,-28.4 170.7,-29.1 162.8,-29.1 163.2,-28.7 170.4,-28.7 171.2,-27.9
S$132
  Bottom 0.5: 188.07,-9.61 188.07,-7.16 184.95,-4.04 173.03,-4.04 171.03,-6.04 171.03,-25.79 169.92,-26.9 162.2,-26.9 162.5,-26.6 169.6,-26.6 171.03,-25.17 171.03,-24.69
S$133  (1 unrouted)
  Bottom 0.5: 161.02,-25.58 169.22,-25.58 170.11,-24.69 170.11,-5.52 172.61,-3.02 187.25,-3.02 190.58,-6.35 190.58,-9.58 | 170.1,-20.6 167.8,-22.9 164.1,-22.9 161.8,-25.2 | 161.4,-25.6 161.8,-25.2 | 161.8,-25.2 169,-25.2 169.8,-24.4 169.8,-21.3 167.7,-23.4 164,-23.4 162.6,-24.8 | 162.5,-24.9 162.6,-24.8 | 162.6,-24.8 168.9,-24.8 169.6,-24.1 169.6,-22.1 169.5,-22 167.6,-23.9 164,-23.9 163.6,-24.3 | 163.4,-24.5 163.6,-24.3 | 163.6,-24.3 169,-24.3 169.4,-23.9 169.4,-22.8 169.2,-22.6 167.9,-23.9 167.9,-24.1 168.6,-24.1 169.1,-23.6 169.1,-23.2 168.5,-23.8
S$134
  Bottom 0.5: 161.11,-20.47 162.61,-18.97 166.57,-18.97 168.22,-17.32 168.22,-4.5 171.67,-1.05 191.86,-1.05 195.67,-4.86 195.67,-8.84
S$135
  Bottom 0.8: 201.9,-36.3 204.5,-36.3 204.6,-36.3 | 204.6,-36.3 205.7,-36.3 | 204.6,-36.3 205.8,-35.1 | 204.6,-36.3 205.8,-37.5
S$136
  Bottom 1: 104,-30.5 107.5,-30.5 107.8,-30.8
S$137
  Bottom 1: 273.5,-11.7 273.5,-12.5 268.7,-17.3 255.7,-17.3 238.8,-0.4 236.4,-0.4 235.6,0.4 231.2,0.4
S$138
  Bottom 0.5: 122.9,-25.7 124.5,-24.1 127.3,-24.1
S$139  (via drill 0.35 pad 1.6)
  other vias: 214.85,16.81
S$140  (via drill 0.35 pad 1.5)
  other vias: 120.2,21.55
S$141  (via drill 0.35 pad 1.5)
  other vias: 121.9,11.93
S$142  (via drill 0.35 pad 1.5)
  other vias: 123.4,11.93
S$143
  Bottom 0.5: 215.3,9.45 216.6,10.75 218.35,10.75 219.29,9.81 223.14,9.81
S$144
  Bottom 0.5: 214.75,6.95 216.2,5.5 218.55,5.5 220.27,7.22 223.73,7.22
S$145
  Bottom 0.5: 214.8,12 214.8,12.8 215.55,13.55 218.1,13.55 219.35,12.3 E$30.7
S$146
  Bottom 0.5: 217.3,12 216.65,12 215.4,10.75 214.1,10.75 213.5,10.15 213.5,8.85 214.1,8.25 216.8,8.25 | 216.8,8.25 217.3,8.25 217.3,8.85 | 217.3,8.85 217.3,9.45 217.35,9.5 217.35,7.7 | 217.35,7.7 217.35,6.9 | 216.75,8.3 217.3,8.85 | 216.8,8.25 217.35,7.7
S$147
  Bottom 0.5: 215.6,4.15 219.1,4.15 219.64,4.69 223.74,4.69
S$148
  Bottom 0.5: 214.2,8.3 213.5,7.6 213.5,-6.75 214.85,-8.1
S$149
  Bottom 0.5: 212.2,12.1 212.2,7 212.3,6.9
S$150
  Bottom 0.5: 215.5,1.65 219.55,1.65 220.05,2.15 223.49,2.15
S$151
  Bottom 1: 286.1,-9.9 284.7,-9.9 276.5,-18.1 276.5,-19.2
S$152  (via drill 0.8 pad 2)
  other vias: 230,-43.51
S$153
  Bottom 1.5: 257.85,-55.55 254.19,-59.21 237.01,-59.21 233,-55.2
S$154
  Bottom 1: 257.75,-5.35 257.8,-5.4
S$155
  Bottom 1: 236.44,-0.45 228.45,-0.45
S$156
  Bottom 1: 237.32,-3.1 235.85,-4.57 235.85,-19.85 | 235.85,-21 235.85,-19.85 | 215,-8 227.95,-8 230.1,-10.15 230.1,-19.25 232,-21.15 234.6,-21.15 | 234.6,-21.15 237.15,-21.15 | 237.15,-21.15 249.45,-21.15 251,-19.6 E$12.1 | 235.85,-19.85 235.9,-19.9 | 237.15,-21.15 235.9,-19.9 | 235.9,-19.9 235.9,-19.85 234.6,-21.15
S$157
  Bottom 0.8: 237.05,4.71 233.37,4.71 231.62,6.46 231.62,17.23 235.12,20.73 265.54,20.73 277.33,8.94 286.29,8.94
S$158
  Bottom 0.8: 237.27,7.17 234.63,7.17 233.11,8.69 233.11,16.39 235.97,19.25 264.2,19.25 277.01,6.44 286.47,6.44
S$159
  Bottom 0.8: 237.36,9.85 235.81,9.85 234.61,11.05 234.61,15.63 236.76,17.78 263.02,17.78 276.86,3.94 286.3,3.94
S$160  (via drill 0.8 pad 2)
  other vias: 230,-31.01
S$161
  Bottom 0.5: 161.97,-21.82 167.17,-21.82 169.17,-19.82 169.17,-5.09 172.2,-2.06 189.62,-2.06 193.1,-5.54 193.1,-8.7
S$162
  Bottom 1: 277.4,-5.5 267.5,-15.4 256.8,-15.4 241.7,-0.3 241.7,0.9 247.9,7.1 253.7,7.1 255.3,5.5 255.3,-7.6 256.5,-8.8 261.5,-8.8 262.6,-7.7 264.5,-9.6 266,-9.6
  Bottom 3: 266,-9.6 270.9,-9.6 272.1,-8.4 264.2,-8.4 262.2,-10.4 255.7,-10.4 253.4,-8.1 253.4,4.3 253.5,4.4 252.5,5.4 252.5,5.6 253.1,5.6 253.3,5.4 253.2,5.3 248.3,5.3 243.5,0.5 255,-11 255.2,-11 257.9,-13.7 267,-13.7 269.5,-11.2 | 270.1,-10.6 269.5,-11.2 | 269.5,-11.2 259.5,-11.2 258.9,-11.8 257.3,-11.8 251,-5.5 251,3.1 248.6,3.1 246.4,0.9 246.4,0.7 249.3,-2.2 | 249.3,-2.2 249.3,-2.5 | 249.3,-2.2 249.3,0.8 249.1,1
S$163
  Bottom 0.5: 161.03,-17.97 166.07,-17.97 167.28,-16.76 167.28,-3.88 171.17,0.01 193.33,0.01 198.22,-4.88 198.22,-9.56
S$164
  Bottom 0.5: 184.4,-53.8 184.4,-49.7
S$165
  Bottom 1: 286.1,-7.3 284.8,-7.3 273.5,-18.6 273.5,-19.3
S$166  (via drill 0.8 pad 2)
  other vias: 220,-31.01
S$167
  Bottom 1: 286.3,-21.2 282.3,-25.2 282.3,-33.9 277.8,-38.4 277.8,-48.8
S$168  (via drill 0.35 pad 1.5)
  other vias: 285,-41.78
S$169  (via drill 0.35 pad 1.5)
  other vias: 283.53,-41.8
S$170
  Bottom 1: 135.23,12.22 141.17,12.22 148.77,19.82 223.73,19.82 226.36,17.19 226.36,-6.35 | 226.36,-6.37 226.36,-7.82 226.4,-7.86 | 227.99,-8 226.36,-6.37 | 226.36,-6.37 226.36,-6.35 | 226.36,-6.35 224.72,-7.99 224.61,-7.99
S$171
  Bottom 1: 235.95,-49.38 247.46,-49.38 251.03,-52.95 251.03,-54.96
S$172  (via drill 0.8 pad 2)
  other vias: 220,-46.51
S$173  (via drill 0.8 pad 2)
  other vias: 230,-46.51
S$174
  Bottom 1: 249.37,14.81 253.94,10.24 254.85,10.24
S$175
  Bottom 1: 273.5,-19.4 272.3,-20.6 267,-20.6
S$176  (via drill 0.8 pad 2)
  other vias: 230,-28.01
S$177
  Bottom 1: 273.6,-27.7 273.3,-27.4 267,-27.4 264.9,-29.5 261.7,-29.5 261.6,-29.4 231.7,-29.4 230.1,-31
S$178
  Bottom 1: 276.5,-19.4 273.2,-22.7 265.2,-22.7 263.1,-20.6
S$179
  Bottom 0.5: 241.34,-49.22 241.37,-49.22
S$180
  Bottom 1: 276.5,-27.6 274,-25.1 265.3,-25.1 263,-27.4
S$181
  Bottom 1: 267,-20.5 265.5,-19 254.4,-19 250.4,-23 224.9,-23 220.1,-27.8
S$182
  Bottom 0.5: 123.1,-35.7 124.9,-33.9 124.9,-29.3 127.3,-26.9
S$183
  Bottom 0.5: 134.8,-27 138.8,-23 142.1,-23
S$184  (3 unrouted)
  Bottom 0.5: 164.48,-13.38 164.48,-1.2 173.13,7.45 | 165.42,-13.89 165.42,-14.18 164.15,-15.45 | 161.15,-15.45 164.15,-15.45 | 164.15,-15.45 164.62,-15.45 165.42,-14.65 165.42,-2.73 172.97,4.82 | 165.42,-3.03 165.42,-1.73 171.95,4.8 172.3,4.8 | 173,4.8 172.3,4.8 | 172.3,4.8 165.6,-1.9 | 164.48,-1.5 164.48,-0.12 171.9,7.3 172.5,7.3 | 172.9,7.3 172.5,7.3 | 172.5,7.3 164.7,-0.5 164.7,-0.6
S$185
  Bottom 0.8: 141.8,-28.7 141.8,-30.5 144.8,-33.5 144.8,-36.2 150.2,-36.2 152.6,-38.6 152.6,-40.9
S$186
  Bottom 0.8: 138.2,-31.5 140.5,-31.5 141.7,-32.7 141.7,-39.4 143.5,-41.2 148,-41.2
S$187  (via drill 0.35 pad 1.5)  (1 unrouted)
  other vias: 230.12,-48.67 228.72,-48.67
S$188
  Bottom 0.8: 286.4,-4.8 287.8,-4.8 288.8,-5.8 288.8,-17.6 287.8,-18.6 286.2,-18.6
S$189
  Bottom 1.5: 254.8,10.2 260,10.2 262.8,7.4 262.8,-2.8 260.4,-5.2 258,-5.2
S$190
  Bottom 1: 277.95,-5.35 275.7,-7.6 263.7,-7.6
S$191
  Bottom 1: 263,-20.6 255.4,-20.6 251.2,-24.8 226.3,-24.8 220.1,-31
S$192  (via drill 3 pad 5)
  other vias: 98.5,20.4
S$193  (via drill 3 pad 5)
  other vias: 98.5,-76.5
S$194  (via drill 3 pad 5)
  other vias: 290.5,-76.4
S$195  (via drill 3 pad 5)
  other vias: 290.4,20.4
S$196
  Bottom 0.8: 153.6,-54.8 153.7,-54.7 162.9,-54.7 165.5,-52.1 165.5,-34.9 163.9,-33.3 161,-33.3
S$197  (via drill 0.35 pad 1.6)
  other vias: 212.15,16.75
S$198
  Bottom 0.5: 176.91,-23.34 185.76,-23.34 193.93,-31.51
S$199
  Bottom 0.5: 138.45,17.35 135.25,17.35
S$200  (via drill 0.35 pad 1.5)
  Top 0.5: v138.88,15.22 139.23,15.22
S$201
  Bottom 0.5: 216.7,-3.32 217.05,-2.97 223.39,-2.97
S$202
  Bottom 0.5: 187.21,-22.29 196.57,-31.55
S$203  (via drill 0.35 pad 1.5)
  other vias: 202.62,-36.38
S$204  (via drill 0.35 pad 1.5)
  other vias: 194.12,-36.5
S$205
  Bottom 1: 104.1,-33 107.7,-33
S$206  (via drill 0.35 pad 1.5)
  Top 0.8: v195.62,-36.5 200.75,-36.5
S$207  (via drill 0.35 pad 1.5)  (2 unrouted)
  Top 0.5: v106.85,-12.55 106.85,-9.85 110.1,-6.6 111.7,-6.6 116.95,-11.85 v116.95,-16.35
  other vias: 106.85,-14.05 116.95,-17.85
S$208
  Bottom 0.5: 128.1,-2.7 125,-5.8 113.2,-5.8 109.9,-9.1 105.7,-9.1 104.1,-10.7 104.1,-12.7
S$209
  Bottom 1: 104.1,-15.2 105.8,-15.2 106.8,-14.2
S$210
  Bottom 0.3: 122.9,-15.5 121.7,-16.7 119.5,-16.7 | 119,-16.7 118.1,-16.7 117,-17.8 118.4,-17.8 119.3,-16.9 | 119.5,-16.7 119.3,-16.9 | 119.3,-16.9 118.2,-16.9 117.6,-17.5 117.6,-17.6 118.3,-17.6 118.8,-17.1 118.8,-17 118.4,-17 118.1,-17.3 118.1,-17.4 118,-17.4 118.2,-17.2 118.5,-17.2 | 118.5,-17.2 118.3,-17.4 | 118.5,-17.2 119,-16.7 | 119,-16.7 119.5,-16.7
S$211
  Bottom 0.8: 194,-34.25 194,-36.25
S$212
  Bottom 0.8: 196.62,-34.12 198.25,-34.12 | 198.25,-34.12 198.38,-34.12 | 198.38,-34.12 199,-34.12 | 203.25,-9.5 203.25,-24.5 199.25,-28.5 199.25,-33.12 | 199.25,-33.12 199.25,-35 | 199.25,-35 199.25,-41 196.5,-43.75 183.25,-43.75 180.62,-46.38 180.62,-50.12 174.15,-56.6 150.85,-56.6 144.62,-50.38 144.62,-45.75 134.47,-35.6 129.35,-35.6 127.88,-34.12 127.88,-31.88 | 198.25,-34.12 199.25,-33.12 | 198.38,-34.12 199.25,-35
S$213  (via drill 0.35 pad 1.5)
  other vias: 202.2,-4.8
S$214
  Bottom 1.5: E$26.1 272.2,-55.4 275.9,-59.1 275.8,-59.2 | 285.7,-54.9 285.7,-58 284.5,-59.2 282.4,-59.2 | 285.49,-54.93 285.12,-54.93 280.85,-59.2 | 280.85,-59.2 275.8,-59.2 | 262.8,-59.2 261.38,-59.2 257.81,-55.63 | 280.85,-59.2 282.4,-59.2 | 282.4,-59.2 284.9,-56.7 | 275.8,-59.2 262.8,-59.2 | 262.8,-59.2 260.2,-56.6 | 259.9,-56.3 260.2,-56.6 | 260.2,-56.6 271.5,-56.6 273.4,-58.5 | 273.4,-58.5 273.6,-58.5 | 273.4,-58.5 263.6,-58.5 262.9,-57.8 | 262.6,-57.5 262.9,-57.8 | 262.9,-57.8 271,-57.8
S$215  (1 unrouted)
  Top 1: 122.6,11.53 122.6,10.3 116,3.7 116,-3.5 119.75,-7.25 128.75,-7.25 133.3,-11.8 143.52,-11.8 146.68,-14.96 146.68,-39.11 | 146.68,-38.11 146.68,-39.68 148,-41
S$216
  Bottom 1.5: 257.7,-5.2 261,-1.9 261,7.3 259.3,9 255.8,9 255.2,9.6 255.2,9.8 259.4,9.8 262.1,7.1 262.1,-1.8 259.7,-4.2
S$217
  Bottom 1.5: 254.7,10.1 252.4,10.1 248,14.5
S$218  (1 unrouted)
  Bottom 0.5: 161.15,-12.94 162.98,-12.94 163.64,-12.28 163.64,0.44 172.96,9.76 | 163.64,0.38 163.64,1.64 171.7,9.7 172.3,9.7 | 172.8,9.7 172.3,9.7 | 172.3,9.7 163.9,1.3 163.9,1
S$219  (1 unrouted)
  Bottom 0.5: 162.19,-11.46 162.73,-10.92 162.73,2.16 172.91,12.34 | 162.73,1.88 162.73,3.23 171.7,12.2 172.2,12.2 | 172.7,12.2 172.2,12.2 | 172.2,12.2 163,3 163,2.8
S$220  (1 unrouted)
  Bottom 0.5: 158.51,-40.85 156.12,-40.85 153.7,-38.43 153.7,-33.77 155.84,-31.63 155.84,-8.57 160.59,-3.82 160.59,5.12 173.02,17.55 | 160.6,3.9 160.6,4 171.7,15.1 171.7,15.7 | 171.7,16.1 171.7,15.7 | 171.7,15.7 160.9,4.9 160.9,4.8
S$221
  Bottom 0.5: 159.89,-5.84 161.59,-4.14 161.59,3.65 172.78,14.84
S$222
  Bottom 1.2: 175.72,2.26 175.72,19.63 175.75,19.66
S$223
  Bottom 1.2: 178.3,17.63 178.3,2.28 178.31,2.27
S$224  (via drill 0.35 pad 1.5)
  other vias: 182.14,22.01
S$225  (via drill 0.35 pad 1.5)
  other vias: 181.38,15.82
S$226  (via drill 0.35 pad 1.5)
  other vias: 181.38,14.32
S$227  (via drill 0.35 pad 1.5)
  other vias: 285,-39.2
S$228  (via drill 0.35 pad 1.5)
  other vias: 283.6,-39.2
S$229
  Bottom 1.5: 238.3,14.8 239.1,15.6 249.11,15.6 250.74,13.97
S$230  (via drill 0.35 pad 1.5)
  other vias: 263.2,2.4
S$231
  Bottom 1.5: 277.7,-5.1 264.9,-5.1 263.8,-6.2 | 261.6,-8.4 263.8,-6.2 | 263.8,-6.2 276,-6.2 274.5,-7.7 274.3,-7.7
  Bottom 2: 274.3,-7.7 263.7,-7.7
S$232
  Bottom 1: 263,-27.5 262.6,-27.1 230.9,-27.1 230,-28
S$233
  Bottom 0.5: 216,-40.1 216.8,-40.9 216.8,-43.5 219.8,-46.5 220.1,-46.5
S$234
  Bottom 1: 255.3,9 257.8,6.5 257.8,-3.5 | 257.8,-5.3 257.8,-3.5 | 257.8,-3.5 260,-1.3 260,6.7 258.7,8 257.1,8 | 257.1,8 256.9,8.2 | 257.1,8 257.9,7.2 258.5,7.2 259.1,6.6 259.1,-1.4 258.9,-1.4 258.5,-1.8 258.5,6.3 258.4,6.4
S$235
  Bottom 1: 248.5,15.8 249.1,15.8 249.14,15.84 249.13,15.85 | 249.13,15.85 247.9,15.85 | 249.13,15.85 254.69,15.85 259.14,11.4 | 261.57,8.96 259.14,11.4 | 259.14,11.4 255,11.4 251.3,15.1 | 251.3,15.1 250.9,15.1 | 251.3,15.1 254.5,15.1 257.5,12.1 257.5,11.7 255.7,11.7 252.9,14.5 254.1,14.5 256.6,12
S$236
  Bottom 0.5: 214.9,-38.6 216.1,-38.6 217.9,-40.4 217.9,-42.5 218.9,-43.5 220,-43.5
S$237
  Bottom 0.4: 180.62,-6.01 180.98,-6.01 181.02,-5.97 182.27,-5.97 183.01,-6.71 183.01,-7.84 182.7,-7.54 182.7,-6.8 182.1,-6.2 181.9,-6.2 181.9,-6.3 182.5,-6.9
S$238
  Bottom 0.4: 182.9,-5 183.13,-5 183.16,-4.97 184.37,-4.97 185.58,-6.18 185.58,-6.98 | 185.58,-7.46 185.58,-6.98 | 185.58,-6.98 183.8,-5.2 184.2,-5.2 185.4,-6.4
S$239
  Bottom 0.4: 184.5,-4 184.51,-3.99 186.59,-3.99 188.12,-5.52 188.12,-6.82 | 188.12,-7.75 188.12,-6.82 | 188.12,-6.82 185.5,-4.2 186,-4.2 187.9,-6.1 187.9,-5.7 186.4,-4.2
S$240
  Bottom 0.4: 186.4,-3 186.99,-3 187.02,-2.97 188.77,-2.97 190.63,-4.83 190.63,-5.33 | 190.63,-7.14 190.63,-5.33 | 190.63,-5.33 188.5,-3.2 187.9,-3.2 | 187.9,-3.2 187.8,-3.1 | 187.9,-3.2 190.4,-5.7 190.4,-5.5 188.4,-3.5
S$241
  Bottom 0.4: 188.9,-2.1 188.99,-2.01 191.31,-2.01 193.15,-3.85 193.15,-6.22 193.1,-6.17 193.1,-4.1 191.3,-2.3 190.3,-2.3 192.8,-4.8 192.8,-4.3 191,-2.5 190.9,-2.5
S$242
  Bottom 0.4: 192.2,0 196.7,-4.5 196.7,-6.7 198.2,-8.2 198.2,-7.7 197,-6.5 197,-4.6 197.9,-5.5 197.9,-6.9 | 197.9,-7 197.9,-6.9 | 197.9,-6.9 197.3,-6.3 197.3,-5.2 197.6,-5.5 197.6,-6.3 197.9,-6 197.9,-4.9 193.3,-0.3 192.9,-0.3 197.6,-5 197.7,-5
S$243
  Bottom 0.4: 194.1,-3.3 194.1,-6.8 195.3,-8 | 195.6,-8.3 195.3,-8 | 195.3,-8 195.3,-5 194.3,-4 194.3,-6.5 194.9,-7.1 | 195.1,-7.3 194.9,-7.1 | 194.9,-7.1 194.9,-4.8 194.6,-4.5 194.5,-4.5 194.5,-6.2 194.8,-6.5
S$244
  Bottom 0.4: 191.6,-4.1 191.6,-6.7 192.7,-7.8 | 193,-8.1 192.7,-7.8 | 192.7,-7.8 192.7,-5.4 192,-4.7 191.9,-4.7 191.9,-6.6 192.4,-7.1 | 192.5,-7.2 192.4,-7.1 | 192.4,-7.1 192.4,-5.3 192.2,-5.1 192.2,-6.6
S$245
  Bottom 0.4: 189,-4.8 189,-6.8 190.2,-8 | 190.4,-8.2 190.2,-8 | 190.2,-8 190.2,-6.4 189.3,-5.5 189.3,-6.6 189.9,-7.2 | 189.9,-7.2 189.9,-7.4 | 189.9,-7.2 189.9,-6.5 189.6,-6.2 | 189.6,-6.2 189.6,-6.1 | 189.6,-6.2 189.6,-6.5 189.7,-6.6
S$246
  Bottom 0.4: 186.4,-5.6 186.4,-6.9 187.9,-8.4 187.9,-7.4 186.7,-6.2 186.7,-6.7 187.6,-7.6 187.6,-7.8
S$247
  Bottom 0.4: 182.7,-5.2 184,-6.5 184,-7.1 185.4,-8.5 185.4,-7.5 183.2,-5.3 183.1,-5.3 184.1,-6.3 184.1,-6.7 185.2,-7.8
S$248
  Bottom 0.4: 186.7,-22.2 196.1,-31.6 196.2,-31.6 | 196.6,-31.6 196.2,-31.6 | 196.2,-31.6 194.9,-30.3 194.3,-30.3 186.16,-22.16
S$249
  Bottom 0.4: 185.3,-23.4 193.4,-31.5 193.5,-31.5 | 193.9,-31.5 193.5,-31.5 | 193.5,-31.5 192.3,-30.3 191.8,-30.3 184.9,-23.4
S$250
  Bottom 0.4: 179,-26.1 186,-26.1 186.1,-26.2 185.7,-26.2 | 185.7,-26.2 185.5,-26 | 185.7,-26.2 191.1,-31.6 191.2,-31.6 | 191.5,-31.6 191.2,-31.6 | 191.2,-31.6 189.9,-30.3 189.4,-30.3 185.2,-26.1 185.2,-25.9 184.3,-25 178.2,-25 179,-25.8 184.6,-25.8 | 184.8,-25.8 184.6,-25.8 | 184.6,-25.8 184,-25.2 178.9,-25.2 179,-25.3 179,-25.5 184.1,-25.5
S$251
  Bottom 0.4: 184.2,-27.2 188.5,-31.5 188.6,-31.5 | 188.9,-31.5 188.6,-31.5 | 188.6,-31.5 187.4,-30.3 186.8,-30.3 183.8,-27.3 183.8,-27.2
S$252
  Bottom 0.4: 182.9,-28.5 184.7,-30.3 | 186.3,-31.5 185.9,-31.5 184.7,-30.3 | 184.7,-30.3 184.2,-30.3 182.3,-28.4
S$253
  Bottom 0.4: 177.7,-32.3 179.4,-34 180.7,-34 | 181.2,-34 180.7,-34 | 180.7,-34 179.3,-32.6 178.4,-32.6 179.5,-33.7 179.5,-33.8 180.1,-33.8 179.1,-32.8 179,-32.8
S$254
  Bottom 0.4: 183.1,-37.3 183.6,-37.3 186.1,-34.8 | 186.5,-34.4 186.1,-34.8 | 186.1,-34.8 186.1,-35.9 184.9,-37.1 184.8,-37 184.3,-37 | 184.2,-37 184.3,-37 | 184.3,-37 185.8,-35.5 | 185.9,-35.4 185.8,-35.5 | 185.8,-35.5 185.8,-35.7 184.8,-36.7
S$255
  Bottom 0.4: 185.2,-38.7 185.4,-38.7 189,-35.1 | 189,-35.1 189,-34.7 | 189,-35.1 189,-35.5 186.3,-38.2 | 186,-38.5 186.3,-38.2 | 186.3,-38.2 188.1,-38.2 188.6,-37.7 188.7,-37.7 188.7,-36.2 188.6,-36.1 186.9,-37.8 186.9,-37.9 187.9,-37.9 188.5,-37.3 188.5,-36.7 187.5,-37.7 | 187.5,-37.7 187.4,-37.7 | 187.5,-37.7 187.8,-37.7 188.4,-37.1
S$256
  Bottom 0.4: 188.76,-39.75 190.2,-38.32 190.2,-35.7 191.2,-34.7 | 191.5,-34.4 191.2,-34.7 | 191.2,-34.7 191.2,-37.6 190.5,-38.3 | 189.2,-39.6 190.5,-38.3 | 190.5,-38.3 190.5,-35.6 190.9,-35.2 190.9,-37.6 190.8,-37.7
S$257
  Bottom 0.4: 137.3,3 138.3,3 142.6,-1.3 144.2,-1.3 140.3,2.6 139,2.6 142.6,-1 143.6,-1 140.2,2.4 139.6,2.4 142.7,-0.7 143,-0.7 140.1,2.2
S$258
  Bottom 0.4: 134.9,1.9 136,1.9 139.3,-1.4 141.3,-1.4 138.3,1.6 136.6,1.6 139.3,-1.1 140.7,-1.1 138.3,1.3 137.3,1.3 139.4,-0.8 139.9,-0.8 | 140,-0.8 139.9,-0.8 | 139.9,-0.8 138,1.1
S$259
  Bottom 0.4: 108.6,14.7 109,14.7 116.64,7.06 | 116.64,7.06 118.46,7.06 | 116.64,7.06 116.54,7.06 110.2,13.4 | 110.2,13.4 109,14.6 | 110.2,13.4 109.1,13.4 108.5,14 108.5,14.7 109.5,13.7 109.5,13.6 109.4,13.6 108.7,14.3
S$260
  Bottom 0.4: 110.5,10.7 109,10.7 108,11.7 108,12.3 108.7,12.3 110,11 109.7,11 108.8,11.9 108.4,11.9 | 108.2,11.9 108.4,11.9 | 108.4,11.9 109.3,11 | 109.4,10.9 109.3,11 | 109.3,11 109.1,11 108.3,11.8
S$261
  Bottom 0.4: 109.7,16.1 108.7,16.1 108.1,16.7 108.1,17.3 109,16.4 109,16.3 108.9,16.3 108.5,16.7
  Bottom 0.5: 108.1,17.3 108.46,17.3 117.63,8.13 142.17,8.13 147.8,2.5 153.9,2.5 155.9,0.5 155.9,-2.7
S$262
  Bottom 0.4: 115,13 115.3,12.7 115.3,12.2 118.3,9.2 129.6,9.2 132.4,12 130.9,12 130.4,11.5
  Bottom 1: 130.4,11.5 116.8,11.5 | 116.8,11.5 116.4,11.9 | 116.8,11.5 118.5,9.8 129.4,9.8 131.3,11.7 | 131.3,11.7 131.5,11.7 | 131.3,11.7 130.6,11.7 129.6,10.7 118.4,10.7 118.3,10.8
S$263
  Bottom 1: 114.5,13.7 130.5,13.7 131.9,12.3 130.9,12.3 130.2,13 116,13 115.9,12.9
S$264
  Bottom 1: 134.9,12.2 164.7,12.2 172.3,19.8 169.4,19.8 167.6,18
  Bottom 2: 167.6,18 149.8,18 149.2,18.6 143.6,13 | 143.6,13 143.1,13 | 143.6,13 164,13 169.5,18.5 | 170,19 169.5,18.5 | 169.5,18.5 150.5,18.5 150.1,18.9 147.2,16 147.2,14.3 147,14.1 | 147,14.1 146.9,14.1 | 147,14.1 147.6,14.1 150,16.5 165.4,16.5 165.8,16.1 164.5,14.8 150.1,14.8 150,14.7
S$265
  Bottom 2: 148.7,14.1 149.1,14.1
S$266
  Bottom 2: 142.2,12.5 149.2,5.5 157.3,5.5 165.7,13.9 147.9,13.9 145.6,11.6 149.8,7.4 157,7.4 160.7,11.1 | 160.9,11.3 160.7,11.1 | 160.7,11.1 148.2,11.1 150,9.3 157.2,9.3 157.5,9.6
S$267
  Bottom 0.4: 160.8,5.2 160.6,5.2 158.8,3.4 158.8,-5.1 | 158.8,-5.5 158.8,-5.1 | 158.8,-5.1 160.2,-3.7 160.2,4.5 159,3.3 159,-4.4 159.9,-3.5 159.9,3.8 159.4,3.3 159.2,3.3 159.2,-3.6 159.3,-3.7 159.5,-3.5 159.5,3 159.6,3.1
S$268
  Bottom 0.4: 155.2,3.3 157.6,0.9 157.7,0.9 157.7,2.5 156.9,3.3 155.6,3.3 157.4,1.5 157.5,1.5 157.5,2.4 156.9,3 156.3,3 157.1,2.2 157.3,2.2 157.3,2 156.2,3.1 | 156.2,3.1 156.1,3.1 | 156.2,3.1 156.6,3.1 157.4,2.3
S$269
  Bottom 0.4: 156.7,1.3 156.7,-1.3 157.4,-2 | 157.7,-2.3 157.4,-2 | 157.4,-2 157.4,0.3 157,0.7 | 156.9,0.8 157,0.7 | 157,0.7 157,-1.4 157.2,-1.4 157.2,0.3
S$270
  Bottom 0.4: 104.3,-20.4 105.4,-19.3 108.6,-19.3 | 108.9,-19.3 108.6,-19.3 | 108.6,-19.3 107.9,-20 104.9,-20 105.3,-19.6 107.9,-19.6
S$271
  Bottom 0.4: 104.9,-22.8 106.1,-21.6 110.1,-21.6 | 110.6,-21.6 110.1,-21.6 | 110.1,-21.6 109.1,-22.6 105.6,-22.6 105.6,-22.5 106.2,-21.9 109.3,-21.9 109.4,-21.8 109.4,-21.9 109,-22.3 106.1,-22.3
S$272
  Bottom 0.4: 105,-25.5 106.5,-24 111.6,-24 | 111.8,-24 111.6,-24 | 111.6,-24 110.4,-25.2 105.7,-25.2 106.6,-24.3 110.9,-24.3 110.4,-24.8 106.6,-24.8 | 106.6,-24.8 106.3,-25.1 | 106.6,-24.8 106.8,-24.6 110.1,-24.6 110.2,-24.5
S$273
  Bottom 0.4: 104.7,-27.9 105.8,-26.8 111.4,-26.8 | 111.8,-26.8 111.4,-26.8 | 111.4,-26.8 110.6,-27.6 105.4,-27.6 106,-27 110.7,-27 110.8,-27.1 110.6,-27.3 106.1,-27.3 106,-27.4
S$274
  Bottom 0.4: 111,-26.9 113.7,-24.2 | 113.7,-24.2 113.7,-24 | 113.7,-24.2 113.7,-24.6 111.4,-26.9
S$275
  Bottom 0.4: 104.7,-28.1 105.8,-29.2 110.3,-29.2 114,-25.5 114,-24.6 110.6,-28 110.6,-28.5 110.7,-28.4 | 110.7,-28.4 110.9,-28.4 | 110.7,-28.4 105.5,-28.4 105.9,-28.8 110.4,-28.8
S$276
  Bottom 0.4: 109.6,-29.1 109.7,-29.2 112.5,-29.2 114,-27.7 114,-25 113.9,-24.9 113.9,-27.3 112.2,-29 111,-29 113.7,-26.3 | 113.7,-26.3 113.7,-26.2 | 113.7,-26.3 113.7,-26.9 111.9,-28.7 111.7,-28.7 113.6,-26.8 113.6,-27.3 112.2,-28.7
S$277
  Bottom 0.4: 107.4,-40.6 109.1,-42.3 109.1,-44.1 107.9,-45.3 107.9,-44.9 108.8,-44 108.8,-42.5 108.4,-42.1 | 108.1,-41.8 108.4,-42.1 | 108.4,-42.1 108.4,-44.2 108.3,-44.3
S$278
  Bottom 0.4: 109,-49 109,-45.9 111.55,-43.35 112.32,-43.35
S$279
  Bottom 0.4: 109.2,-49.2 109.2,-46.2 109.3,-46.1
S$280
  Bottom 0.4: 104.6,-53.8 106,-52.4 109.9,-52.4 | 110.1,-52.4 109.9,-52.4 | 109.9,-52.4 108.9,-53.4 105.6,-53.4 106.2,-52.8 106.1,-52.7 | 106.1,-52.7 106,-52.7 | 106.1,-52.7 109.3,-52.7 109,-53 106.3,-53 106.2,-53.1 107.7,-53.1 110.5,-50.3 | 110.6,-50.2 110.5,-50.3 | 110.5,-50.3 110.5,-51.6 109.9,-52.2 109.8,-52.1 109.1,-52.1 110.2,-51 | 110.2,-51 110.2,-50.9 | 110.2,-51 110.2,-51.5 109.9,-51.8 109.8,-51.8 109.8,-51 110.8,-50
  Bottom 0.5: 111.93,-44.97 110.8,-46.1 110.8,-50 110.8,-51.8 108.9,-53.7 104.2,-53.7
S$281
  Bottom 0.5: 158.37,-33.14 156.9,-31.67 156.9,-19.99
S$282
  Bottom 0.5: 203.3,-9.6 203.3,-8.6 200.6,-5.9 200.6,11.1 206.3,16.8 212.1,16.8
S$283
  Bottom 1: 264,-7.1 264,-5.9 267.4,-2.5 279.9,-2.5 | 279.9,-2.5 280,-2.4 | 279.9,-2.5 278.1,-4.3 266.9,-4.3 | 266.6,-4.3 266.9,-4.3 | 266.9,-4.3 268,-3.2 278.1,-3.2 278.5,-3.6 268.4,-3.6
S$284
  Bottom 1: 249.1,14.7 250.24,15.84 262.06,15.84 276,1.9 274.1,0 265.9,0 262.6,-3.3
  Bottom 1.5: 262.6,-3.3 262.6,8.5 256.3,14.8 258,14.8 263.9,8.9 263.9,-1.3 265.4,0.2 265.4,10.5 263.3,10.5 258.8,15 261.3,15 264.9,11.4 264.9,11.1 264.2,11.1 | 264.2,11.1 261.3,14 | 264.2,11.1 264.9,10.4 | 264.9,8.8 264.9,10.4 | 264.9,10.4 265.7,11.2 274.6,2.3 274.6,1.7 273.8,0.9 273.7,1 266.5,1 266.5,9.2 | 266.5,9.2 266.4,9.3 | 266.5,9.2 273.4,2.3 273.4,2.1 268.1,2.1 268,2 267.4,2.6 267.4,6.8 270.9,3.3 | 270.9,3.3 271,3.3 | 270.9,3.3 268.6,3.3 268.6,4.6 268.7,4.7 270.5,2.9 272.1,2.9
S$285
  Bottom 1.5: 237.5,-3.1 250.9,-16.5 250.9,-18.6 249,-20.5 248.7,-20.2 237.5,-20.2 236.9,-19.6 236.9,-4.5 249.7,-17.3 249.7,-18.2 248.9,-19 238,-19 237.9,-18.9 238,-18.8 238,-7.3 248.4,-17.7 239.5,-17.7 239.2,-17.4 239.2,-9.6 | 239.2,-9.6 239,-9.4 | 239.2,-9.6 246,-16.4 246,-17.3 241,-17.3 240.2,-16.5 240.2,-12.3 | 240.2,-12.3 240.1,-12.2 | 240.2,-12.3 244,-16.1 | 244,-16.1 244.6,-16.1 | 244,-16.1 241.3,-16.1 | 241.3,-16.1 241.2,-16.2 | 241.3,-16.1 241.4,-16 241.4,-14.6 242.5,-15.7 242.6,-15.7 240,-18.3 238.9,-18.3 238.9,-8.2 237.5,-6.8
S$286  (1 unrouted)
  Bottom 0.5: 212.4,-43.5 213.8,-44.9 | 216,-45.1 219.5,-48.6 223.2,-48.6 228.3,-43.5 230,-43.5
S$287
  Bottom 0.4: 233.2,-10.4 233.2,-9.6 233.3,-9.5 233.3,-3.8 236.5,-0.6 235.2,-0.6 233.9,-1.9
  Bottom 1: 233.9,-1.9 233.3,-1.3 230,-1.3 229.2,-2.1 229.2,-4.1 232.9,-7.8 | 232.9,-7.8 232.9,-8.1 | 232.9,-7.8 232.9,-3.5 235.3,-1.1 231.2,-1.1 229.9,-2.4 229.9,-3.6 232.2,-5.9 | 232.2,-5.9 232.2,-6.3 | 232.2,-5.9 232.2,-2.9 232.9,-2.2 | 233.1,-2 232.9,-2.2 | 232.9,-2.2 231.4,-2.2 230.9,-2.7 230.9,-3.7 231.4,-4.2 231.6,-4.2 231.6,-3.2 231.7,-3.1
S$288
  Bottom 1: 233.8,-0.5 232.4,-0.5 229.1,2.8 | 228.4,3.5 229.1,2.8 | 229.1,2.8 229.1,1 230.1,0 230.8,0 229.6,1.2
S$289  (via drill 0.35 pad 1.5)
  other vias: 201.12,-36.38
S$290
  Bottom 0.5: 213.71,-14.63 214.89,-15.79
S$291  (via drill 0.35 pad 1.5)
  other vias: 209.32,-56.38
S$292
  Bottom 0.3: 210.2,-14.2 210.26,-14.2 210.56,-14.5 | 213.44,-14.5 213.72,-14.5 213.8,-14.58 | 210.56,-14.5 213.3,-14.5 213.44,-14.5 | 210.56,-14.5 210.3,-14.5 | 213.44,-14.5 213.67,-14.73
S$293  (via drill 0.35 pad 1.5)
  other vias: 210.82,-56.38
S$294
  Bottom 0.5: 207.3,-56.4 209.4,-56.4
S$295
  Top 0.5: 210.9,-56.4 212.7,-58.2 227.8,-58.2 229.6,-56.4 229.6,-49.3 230.2,-48.7
S$296
  Bottom 0.5: 212.41,-35.94 213.37,-34.98
S$297
  Bottom 0.3: 213.7,-34.8 213.4,-34.8 213.1,-35.1 | 213.7,-34.8 216.15,-34.8 | 213.7,-34.8 213.4,-35.1 213.3,-35.1 | 216.15,-34.8 216.43,-34.8 216.75,-35.12 | 216.15,-34.8 216.62,-35.26
S$298
  Bottom 0.5: 189.5,-53.86 188.41,-54.95
S$299
  Bottom 0.3: 188.2,-55.3 188.2,-55.9 188.2,-57.9 | 188.2,-57.9 188.2,-58.18 187.96,-58.42 | 188.2,-57.9 187.64,-58.46 | 188.2,-55.3 188.2,-55.02 188.43,-54.79 | 188.2,-55.3 188.6,-54.9
S$300
  Bottom 0.5: 185.5,-47.2 185,-46.7 184.5,-46.7
S$301